# EAGLE board robotario-2 (EAGLE 9.5.1)
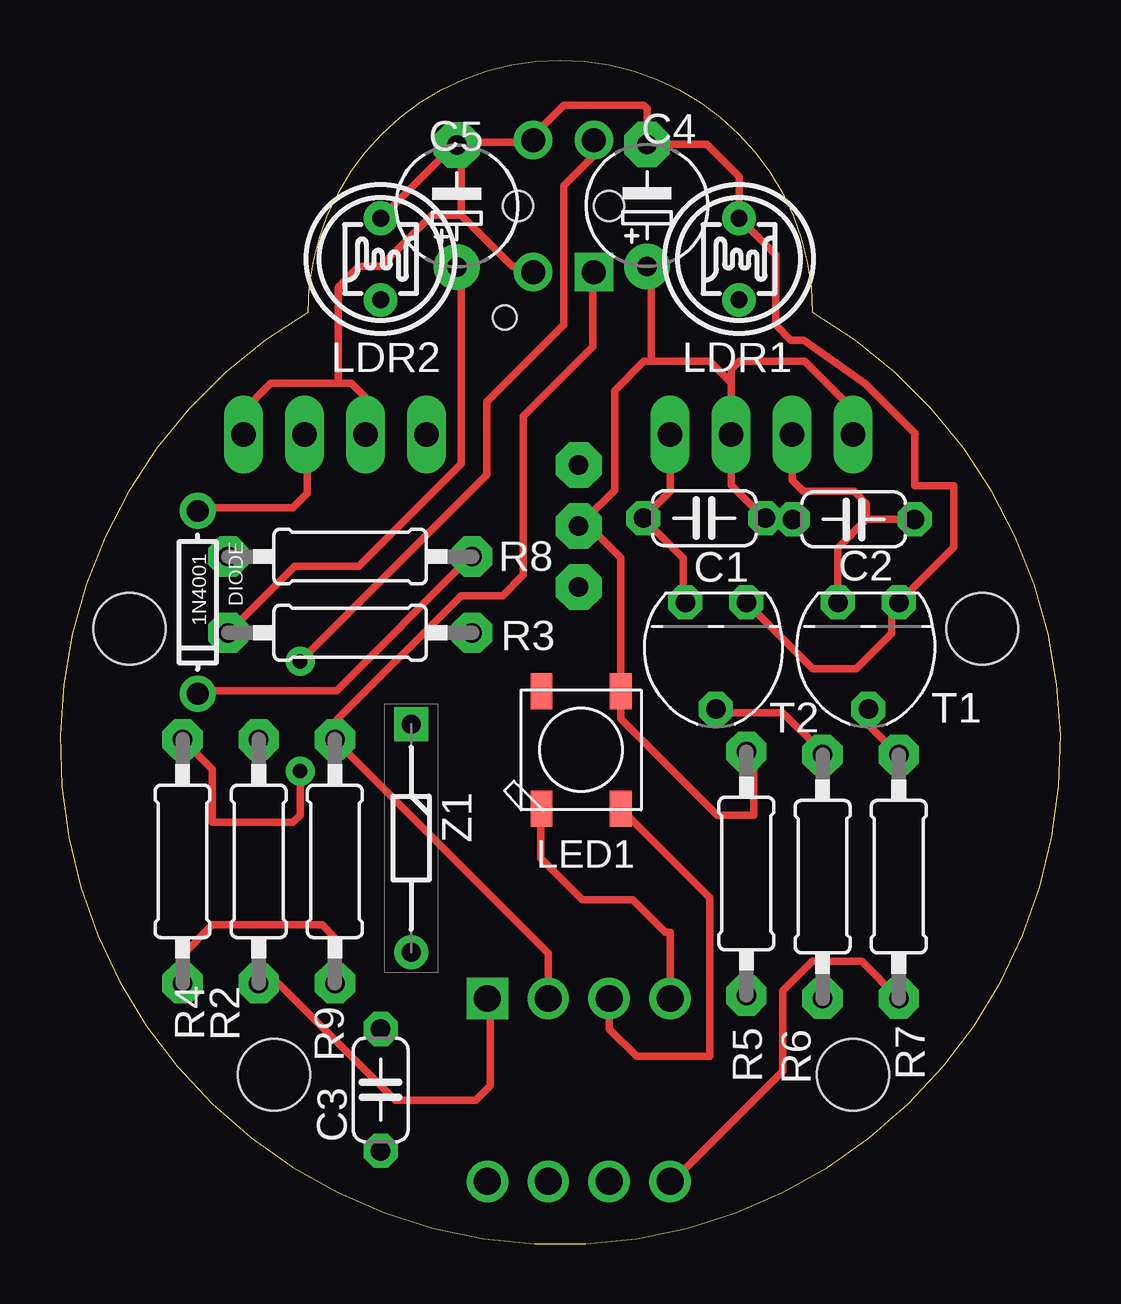
[diagram p0: board, top side]
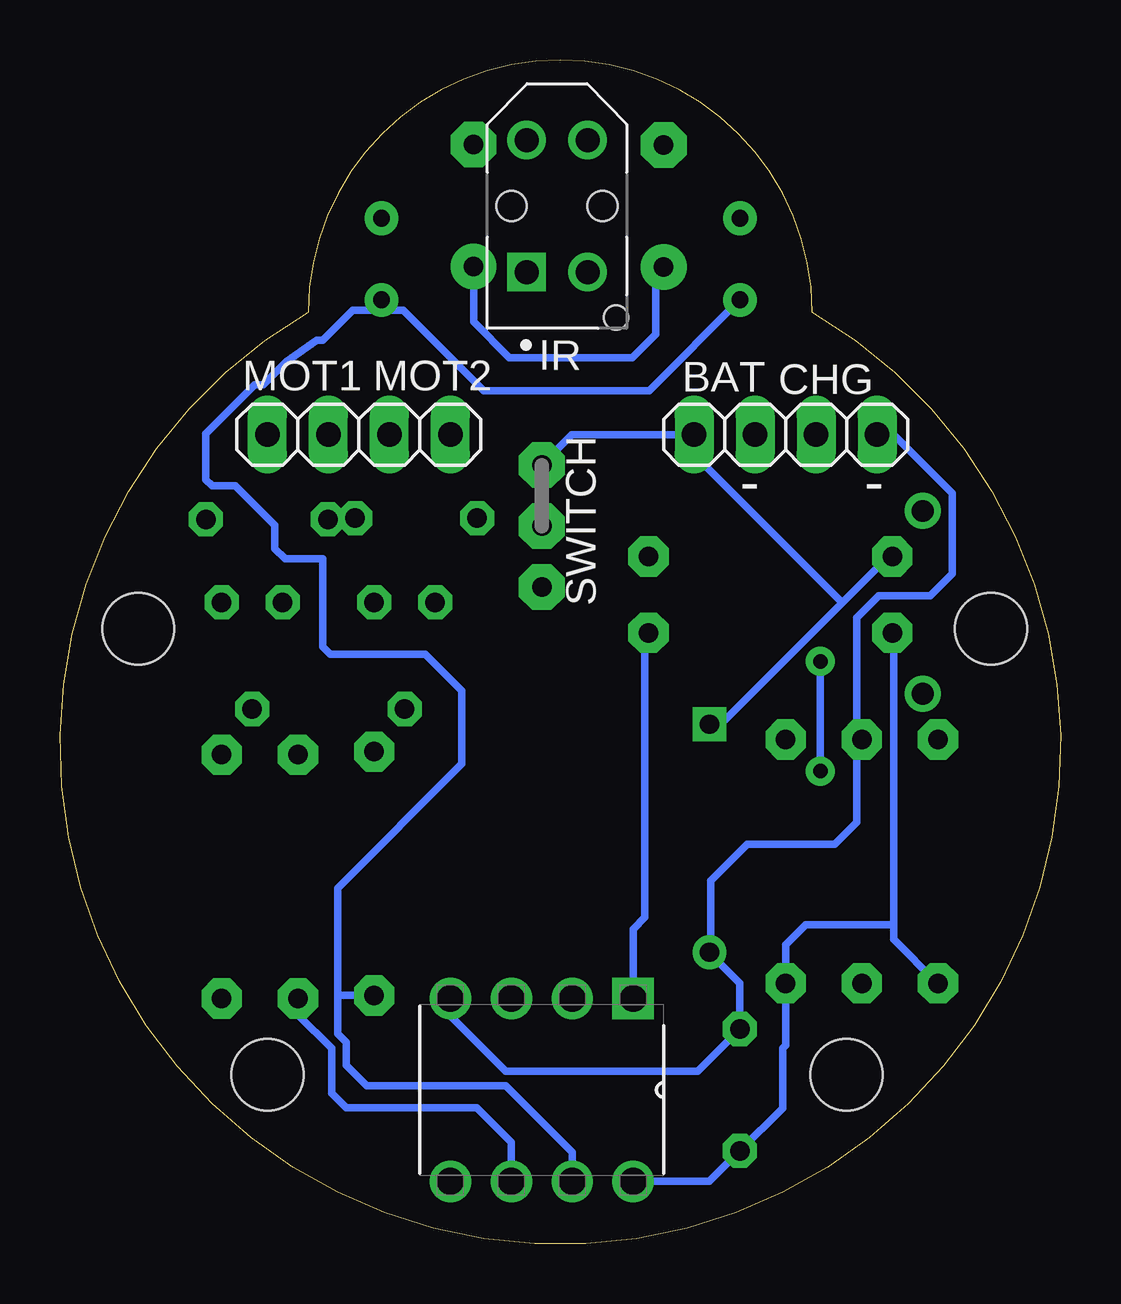
[diagram p1: board, bottom side, seen from below]

Size 41.69 x 49.33 mm. Coordinates in mm from the lower left corner, seen from the top.
Outline: 10.34,38.83 arc300 31.34,38.83 arc180 10.34,38.83
Copper layers (1*16): Top 0.035mm / dielectric 1.5mm / Bottom 0.035mm
Design rules "default *": minimum track width 12mil, minimum drill 0.6mm, track to track 12mil, track to pad 12mil, pad to pad 12mil, via to via 12mil, smd to smd 6mil, copper to edge 40mil, drill to drill 12mil, minimum pad ring 12mil, minimum via ring 12mil, stop-mask expansion 4mil, vias tented up to drill 0mil, thermal gap 10mil
Holes 3 mm at 2.89,25.63 38.43,25.63 8.91,7.05 33.04,7.05

## Footprints (pad centres in the part's own frame; a part is rotated, then mirrored left to right if it is on the bottom)
1X02 = drill 1.016 long: 1 -1.27,0; 2 1.27,0
C050-024X044 = drill 0.813 octagon: 1 -2.54,0; 2 2.54,0
E5-5 = drill 0.813 pad 1.905: + -2.54,0 | drill 0.813 pad 1.905 octagon: - 2.54,0
DO-1N4148 = drill 0.9: A -3.81,0; C 3.81,0
XDCR_TCRT5000L = drill 1 pad 1.6 square: 1 -2.75,1.27 | drill 1 pad 1.6: 2 -2.75,-1.27; 3 2.75,-1.27; 4 2.75,1.27 | hole 1.25: 0,1.9; 0,-1.9 | hole 1: -4.65,-2.45
T0-46-A10XX = drill 0.7 pad 1.4: 1 -1.7,0; 2 1.7,0
WS2812B = smd 1.5 x 0.9: 1-VDD 2.45,-1.65; 2-DOUT 2.45,1.65; 3-GND -2.45,1.65; 4-DIN -2.45,-1.65
0207/10 = drill 0.813 pad 1.676 octagon: 1 -5.08,0; 2 5.08,0
04C = drill 0.813 pad 1.905 octagon: 1 -0.635,0; 2 1.905,0; 3 4.445,0
TO92 = drill 0.813 octagon: 1 1.27,-2.54; 2 0,1.905; 3 -1.27,-2.54
DIP254P762X533-8 = drill 1.118 square: 1 -7.62,7.62 | drill 1.118: 2 -7.62,5.08; 3 -7.62,2.54; 4 -7.62,0; 5 0,0; 6 0,2.54; 7 0,5.08; 8 0,7.62
DIOAD950W60L350D150 = drill 0.8 pad 1.2 square: 1 0,0 | drill 0.8 pad 1.2: 2 9.5,0

## Placement (x,y rotation side)
BAT  [1X02]  13.99,33.72 180 bottom
C1  0.1 uF  [C050-024X044]  26.85,30.24 180 top
C2  0.1 uF  [C050-024X044]  33.07,30.19 0 top
C3  0.1 uF  [C050-024X044]  13.36,6.42 90 top
C4  100 uF  [E5-5]  24.46,43.27 90 top
C5  100 uF  [E5-5]  16.53,43.25 90 top
CHG  [1X02]  8.91,33.72 180 bottom
DIODE  1N4001  [DO-1N4148]  5.74,26.74 270 top
IR  TCRT5000L  [XDCR_TCRT5000L]  20.98,43.25 90 bottom
LDR1  A1050_14  [T0-46-A10XX]  28.29,41.04 90 top
LDR2  A1050_14  [T0-46-A10XX]  13.36,41.04 90 top
LED1  WS2812B5050  [WS2812B]  21.72,20.59 90 top
MOT1  [1X02]  31.77,33.72 0 bottom
MOT2  [1X02]  26.69,33.72 0 bottom
R2  10k  [0207/10]  8.28,15.94 90 top
R3  10k  [0207/10]  12.09,25.47 0 top
R4  1k  [0207/10]  5.1,15.94 90 top
R5  10k  [0207/10]  28.6,15.43 270 top
R6  1k  [0207/10]  31.77,15.31 270 top
R7  1k  [0207/10]  34.95,15.31 270 top
R8  150  [0207/10]  12.09,28.64 0 top
R9  10k  [0207/10]  11.45,15.94 90 top
SWITCH  [04C]  21.61,31.82 270 bottom
T1  2N3904  [TO92]  33.68,24.2 180 top
T2  2N3904  [TO92]  27.33,24.2 180 top
U1  ATTINY85-20PU  [DIP254P762X533-8]  25.42,2.61 270 bottom
Z1  NZX4V3C  [DIOAD950W60L350D150]  14.63,21.66 270 top

## Library data of the parts
BAT CHG MOT1 MOT2 = pinhead
C1-C5 DIODE R2-R9 = adafruit
IR = TCRT5000L-edit; AVAILABILITY: Unavailable; DESCRIPTION: Photointerrupter Reflective Phototransistor 4-Pin Tube; MF: Vishay; MP: TCRT5000L; PACKAGE: PCB Mount Vishay Semiconductor; PRICE: None
LDR1 LDR2 = photo-elements
LED1 = WS2812B; AVAILABILITY: Unavailable; DESCRIPTION: Intelligent Control Led Integrated Light Source Pack Of 10; MF: SparkFun Electronics; MP: WS2812B; PACKAGE: None; PRICE: None
SWITCH = new-switch
T1 T2 = new-t
U1 = ATTINY85-20PU; AVAILABILITY: Unavailable; DESCRIPTION: ATtiny Series 20 MHz 8 KB Flash 512 B SRAM 8-Bit Microcontroller - DIP-8; MF: Microchip; MP: ATTINY85-20PU; PACKAGE: DIP-8 Microchip; PRICE: None
Z1 = BZX55C10; DESCRIPTION: BZX55 Series 10 V ±5 % 500 mW Through Hole Small Signal Zener Diode - DO-35; DIGI-KEY_PART_NUMBER: BZX55C10-GICT-ND; DIGI-KEY_PURCHASE_URL: https://www.digikey.hk/product-detail/en/vishay-semiconductor-diodes-division/BZX55C10-TR/BZX55C10-GICT-ND/6228440?utm_source=snapeda&utm_medium=aggregator&utm_campaign=symbol; MF: Vishay Semiconductor; MP: BZX55C10-TR; PACKAGE: DO-35 Vishay Semiconductor

## Nets
GND: BAT.1 C3.2 C4.- C5.- CHG.1 IR.2 IR.3 LDR1.2 LDR2.2 LED1.3-GND R2.2 T1.3 T2.3 U1.4 Z1.2
N$1: BAT.2 R8.1 SWITCH.1 Z1.1
N$2: R6.1 T2.2
N$3: R7.1 T1.2
N$4: R2.1 R3.2 U1.1
N$5: IR.1 R9.2 U1.2
N$6: LDR1.1 LDR2.1 R5.2 U1.7
N$7: C2.2 MOT1.2 T1.1
N$8: CHG.2 DIODE.A
N$9: LED1.4-DIN U1.3
N$10: C1.2 MOT2.2 T2.1
N$11: R7.2 U1.5
N$12: R6.2 U1.6
N$14: DIODE.C R8.2
N$15: IR.4 R4.2
VCC: C1.1 C2.1 C3.1 C4.+ C5.+ LED1.1-VDD MOT1.1 MOT2.1 R3.1 R4.1 R5.1 R9.1 SWITCH.2 U1.8

## Tracks (layer width: path | path; a pad name or v marks a point on that pad's centre or on a via)
GND
  Top 0.305: 16.71,42.86 18.85,40.73 19.46,40.73 IR.2 | 16.71,42.86 16.71,45.61 C5.- | C5.- 16.71,45.91 19.46,45.91 IR.3 19.76,46.22 20.98,47.44 24.33,47.44 24.46,47.31 C4.- 26.94,45.81 28.29,44.46 LDR1.2 29.82,41.21 29.82,38.29 30.45,37.66 30.98,37.66 | 16.71,42.86 15.49,42.86 13.36,40.73 12.44,40.73 11.61,39.89 11.6,39.81 11.6,35.92 11.53,35.85 | 11.53,35.85 12.14,35.85 12.72,35.27 BAT.1 | 11.53,35.85 8.79,35.85 7.57,34.64 7.57,33.8 CHG.1 | U1.4 25.42,12.99 25.21,12.99 23.86,14.35 21.76,14.35 20.04,16.07 20.04,18.11 LED1.3-GND | LDR2.2 16.41,45.79 C5.- | 30.98,37.66 31.7,37.15 | 31.7,37.15 33.55,35.85 35.63,33.75 35.61,33.72 35.61,31.59 37.25,31.59 37.25,29.03 T1.3 34.66,26.44 34.66,25.45 33.17,23.97 31.37,23.97 T2.3 | 30.98,37.66 31.7,37.15 | 31.7,37.15
  Bottom 0.305: 14.58,12.08 Z1.2 | CHG.1 6.96,33.72 4.52,31.28 4.52,27.93 5.43,27.02 7.57,27.02 8.48,26.1 8.48,21.22 | U1.4 25.42,9.51 23.11,7.2 15.11,7.2 C3.2 13.36,10.86 14.58,12.08 | 14.58,12.08 14.58,15.13 13.05,16.65 9.4,16.65 8.48,17.57 8.48,21.22 | 8.48,21.22 R2.2
N$1
  Bottom 0.305: SWITCH.1 21.59,32.5 20.37,33.72 BAT.2 15.19,33.72 15.19,32.81 9.09,26.71 | 9.09,26.71 7.26,28.54 R8.1 | 9.09,26.71 13.97,21.83 14.58,21.83 Z1.1
N$2
  Top 0.305: T2.2 27.38,22.14 30.12,22.14 31.65,20.61 R6.1
N$3
  Top 0.305: T1.2 33.78,22.14 33.78,21.53 34.7,20.61 R7.1
N$4
  Top 0.305: R2.1 9.09,10.86 13.97,5.98 17.32,5.98 17.93,6.59 17.93,10.1 U1.1
  Bottom 0.305: R3.2 17.32,25.19 17.32,13.6 17.8,13.12 U1.1
N$5
  Top 0.305: IR.1 22.2,40.43 22.2,37.38 19.3,34.48 19.3,27.88 18.44,27.02 16.71,27.02 11.53,21.83 11.53,21.22 R9.2 11.53,20.92 20.34,12.11 U1.2
N$6
  Bottom 0.305: U1.7 20.34,3.83 23.11,6.59 28.9,6.59 29.77,7.46 29.77,8.41 30.12,8.77 30.12,10.25 | 30.12,10.25 30.12,14.82 24.94,20 24.94,23.05 26.47,24.58 30.43,24.58 30.73,24.88 30.73,28.54 31.34,28.54 | R5.2 30.02,10.35 30.12,10.25 | 28.73,38.9 27.38,38.9 24.03,35.55 17.15,35.55 LDR2.1 | 28.73,38.9 LDR1.1 | 28.73,38.9 29.5,38.9 30.74,37.66 30.98,37.66 32.25,36.76 33.21,35.8 33.57,35.8 35.61,33.76 35.61,31.84 35.35,31.59 34.39,31.59 32.74,29.94 32.74,28.97 32.31,28.54 31.34,28.54 | 31.34,28.54
N$7
  Top 0.305: T1.1 32.41,29 33.6,30.19 | 33.6,30.19 C2.2 | MOT1.2 30.5,31.82 30.96,31.36 31.01,31.36 33.1,31.36 33.6,30.85 33.6,30.19
N$8
  Top 0.305: DIODE.A 5.74,30.67 9.7,30.67 10.31,31.28 10.31,33.72 CHG.2
N$9
  Top 0.305: U1.3 22.88,8.96 24.03,7.81 27.08,7.81 27.08,14.43 LED1.4-DIN
N$10
  Top 0.305: MOT2.2 25.42,31.36 C1.2 25.97,28.58 25.97,26.82 T2.1
N$11
  Top 0.305: U1.5 25.55,2.63 30.12,7.2 30.12,10.56 31.34,11.78 33.4,11.78 R7.2
N$12
  Bottom 0.305: U1.6 22.88,4.23 24.33,5.68 29.77,5.68 30.38,6.29 30.38,8.16 31.77,9.55 R6.2
N$14
  Top 0.305: DIODE.C 5.74,23.05 11.53,23.05 17.02,28.54 R8.2
N$15  (via drill 0.6)
  Top 0.305: v10.01,24.27 17.78,32.04 17.78,35.09 20.98,38.29 20.98,44.08 22.2,45.3 22.2,45.91 IR.4 | R4.2 6.35,19.78 6.35,17.57 9.7,17.57 10.01,17.87 v10.01,19.7
  Bottom 0.305: v10.01,19.7 v10.01,24.27
VCC
  Top 0.305: C4.+ 24.64,40.73 24.64,36.77 | 21.59,29.76 SWITCH.2 21.83,30.13 | R9.1 11.45,12.77 10.92,13.3 6.35,13.3 5.1,12.05 R4.1 | 24.64,36.77 27.08,36.77 27.96,35.88 | 24.64,36.77 24.33,36.77 23.11,35.55 23.11,31.41 21.83,30.13 | C5.+ 16.71,40.53 16.71,32.5 12.44,28.23 9.78,28.23 R3.1 | 27.96,35.88 27.96,36.44 28.29,36.77 31.04,36.77 33.04,34.76 MOT1.1 | C2.1 30.48,30.24 C1.1 29.34,30.24 27.96,31.61 MOT2.1 27.96,35.88 | 21.83,30.13 23.37,28.59 LED1.1-VDD 23.37,21.89 27.38,17.87 28.9,17.87 28.9,20.21 R5.1
  Bottom 0.305: 6.96,13.3 6.96,12.69 5.13,10.86 R4.1 | 6.96,13.3 6.96,25.19 R3.1 | 11.53,10.86 R9.1 | 27.99,33.72 MOT2.1 | U1.8 14.63,2.61 C3.1 11.58,5.65 11.58,8.16 11.45,8.28 R9.1 | R9.1 11.45,12.46 10.62,13.3 6.96,13.3 | C5.+ 16.86,40.38 16.86,37.9 17.84,36.93 22.97,36.93 24.46,38.42 C4.+

## Text on the board
bNames: - | -
bValues: Robotario v2 | 2019/11/16 | Design by Y.G. & R.C.